# Altium PCB main.PcbDoc
Units mil, origin at the board's own origin, x right, y up, seen from the top; angles counter-clockwise.
Board outline 2130 x 1565 mil, 2 copper layers (Top Layer, Bottom Layer); 12 components, 7 nets, 26 pads, 4 vias.
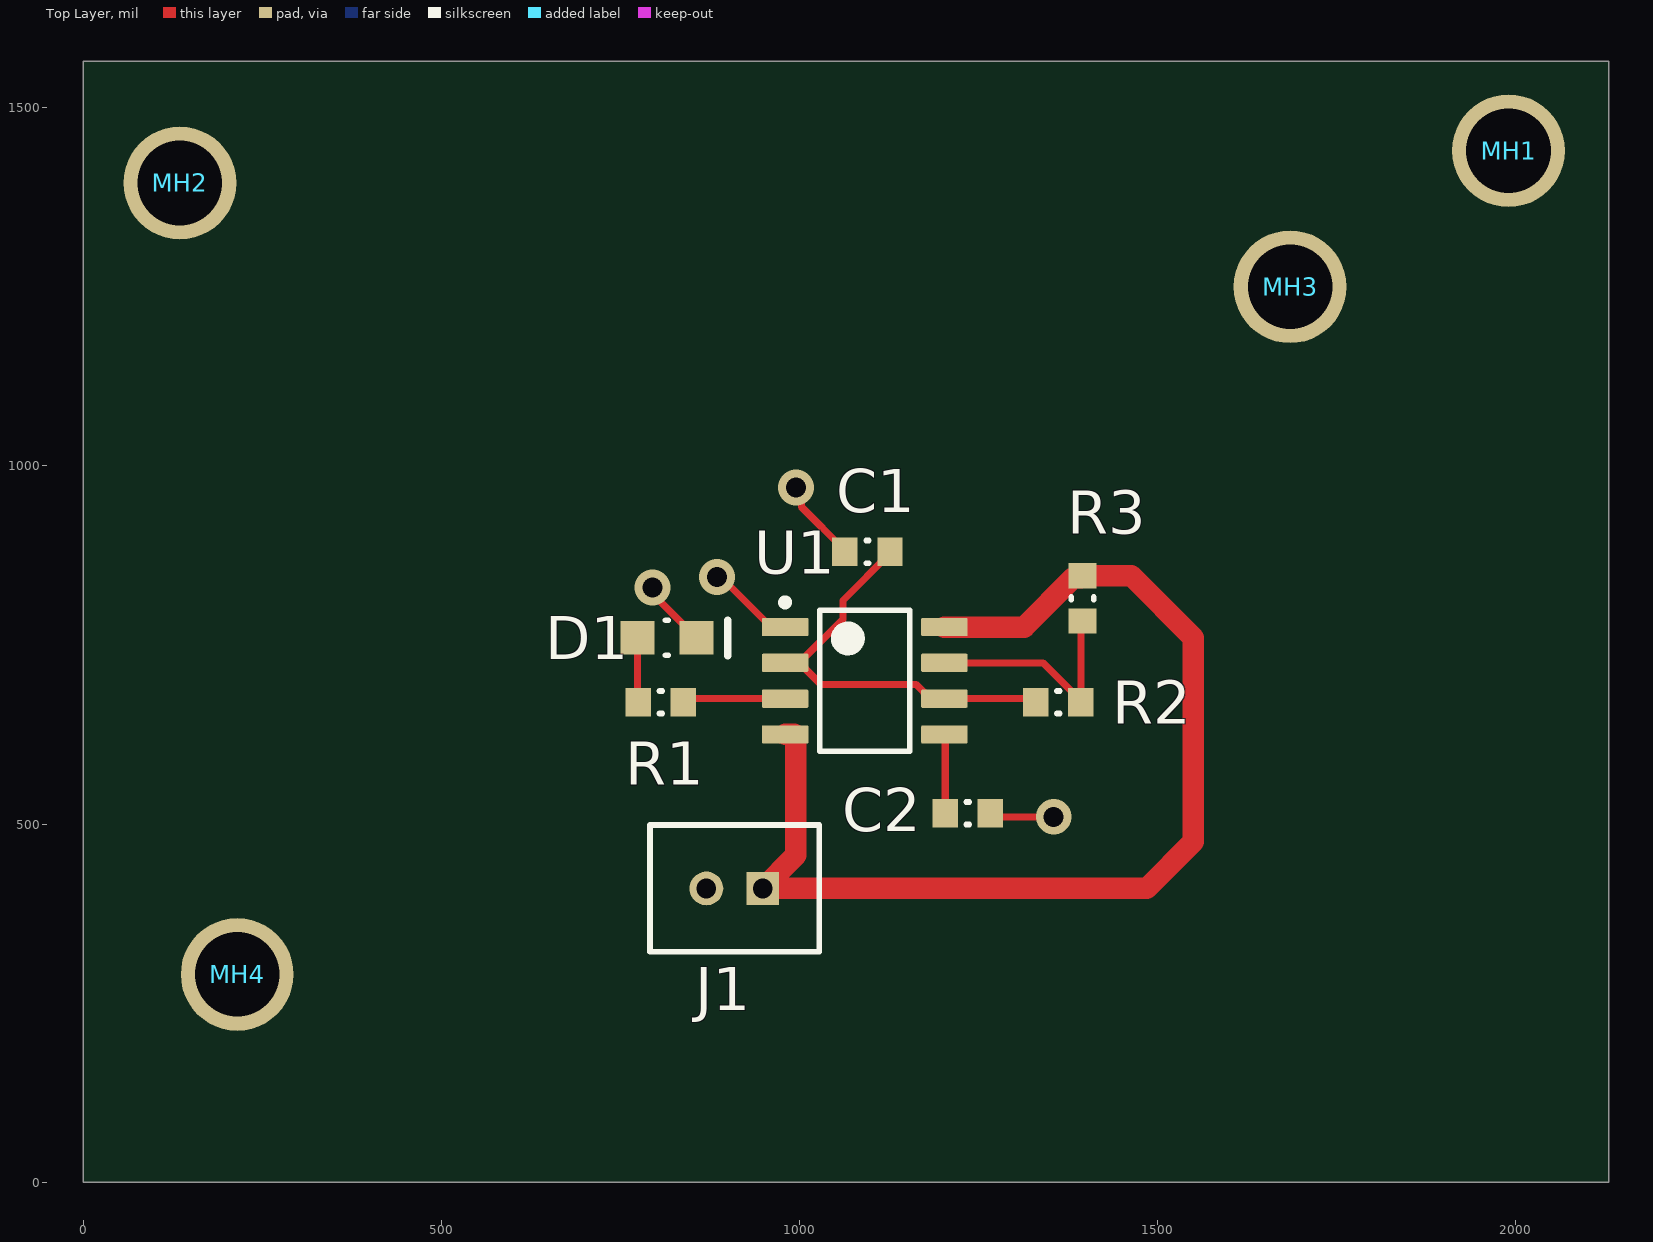
[diagram p0: Top Layer view]
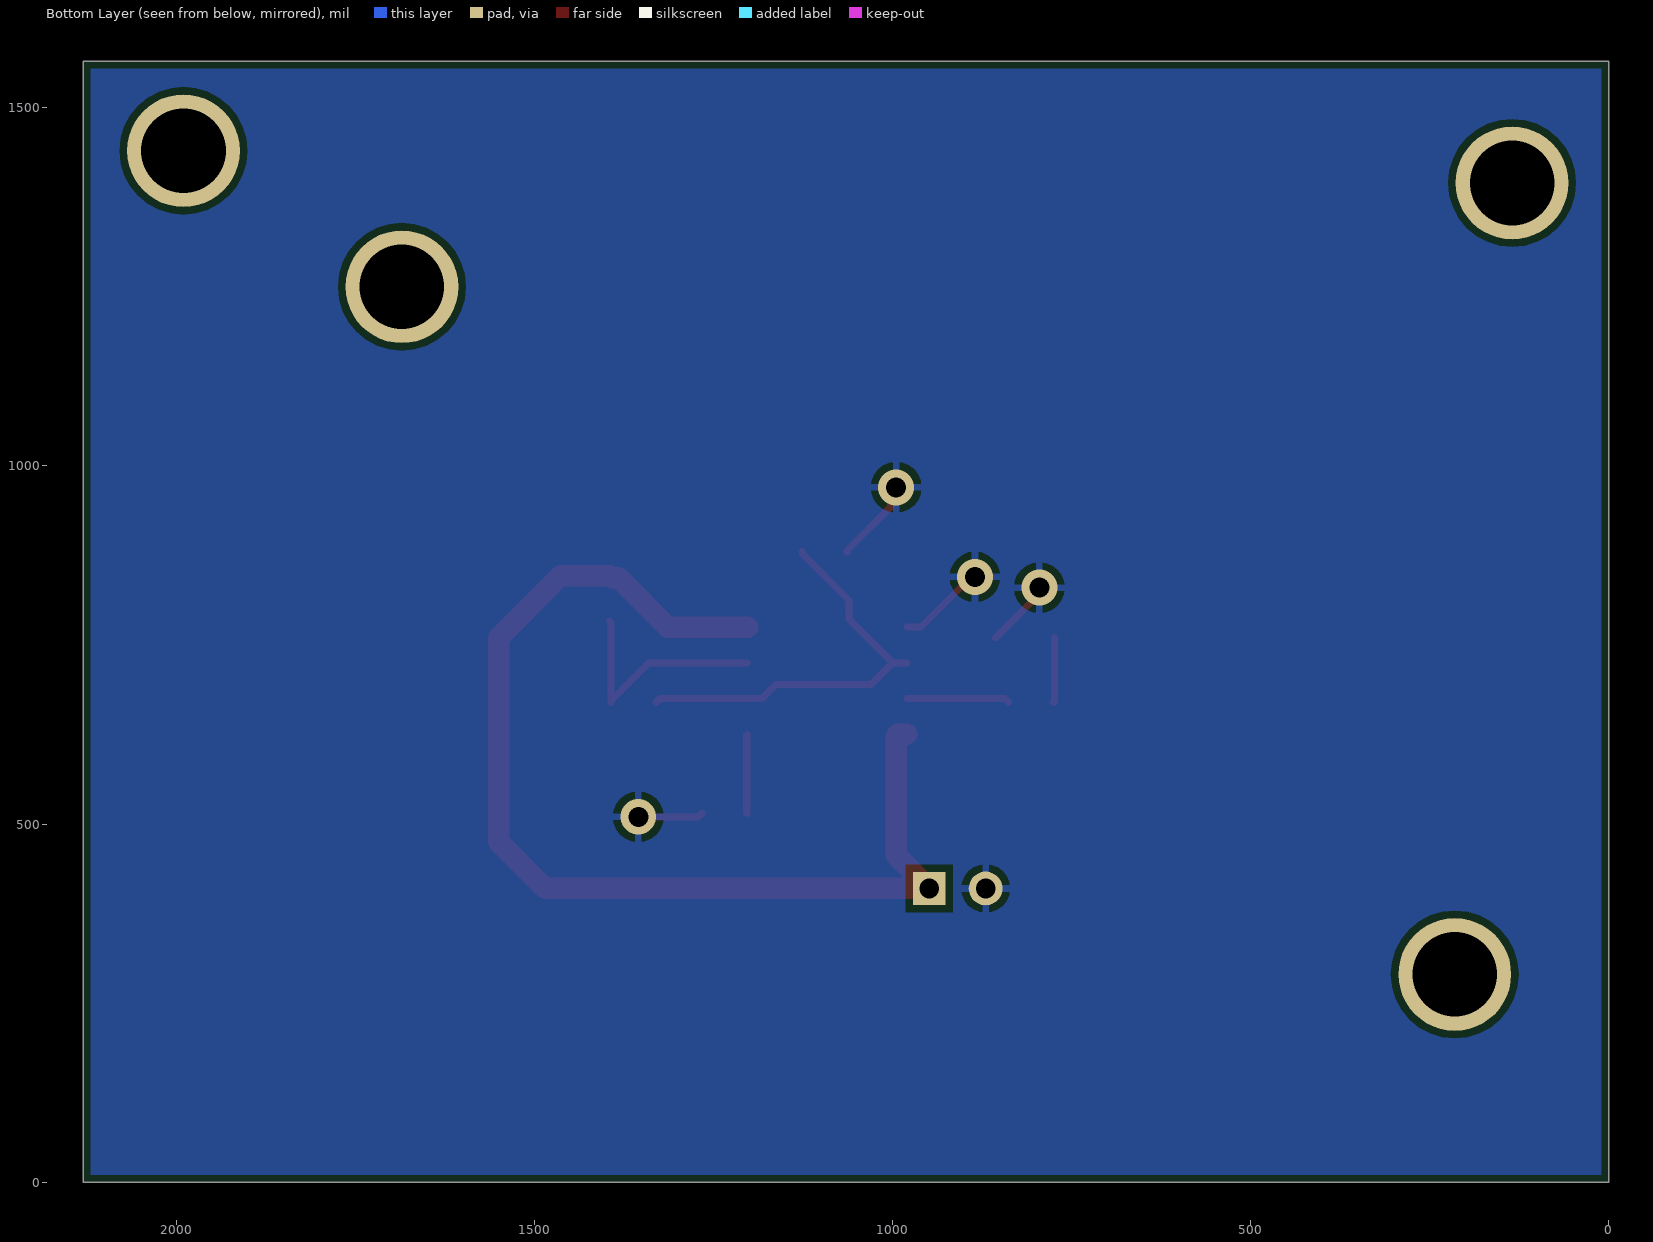
[diagram p1: Bottom Layer view, seen from below]

## Layer stack, top to bottom
Top Solder: solder mask 0.4, Solder Resist, Dk 3.5
Top Layer: signal copper 1.4
Dielectric 1: dielectric 12.6, FR-4, Dk 4.8
Bottom Layer: signal copper 1.4
Bottom Solder: solder mask 0.4, Solder Resist, Dk 3.5

## Board outline
0,0 2130,0 2130,1565 0,1565

## Design rules (kind name [scope] priority, off if disabled: settings)
BoardOutlineClearance [All] p1: gap=10 ignorepadtopadclearanceinfootprint=FALSE except(0: Arc-SplitContinuation Track-SplitContinuation SMDPad-SplitContinuation THPad-SplitContinuation Via-SplitContinuation Fill-SplitContinuation Poly-SplitContinuation Region-SplitContinuation Text-SplitContinuation)
Clearance [All] p1: gap=10 ignorepadtopadclearanceinfootprint=FALSE except(0: Arc-Hole Track-Hole SMDPad-Hole THPad-Hole Via-Hole Fill-Hole Poly-Hole Region-Hole Text-Hole)
PolygonConnect [All] p1: connectstyle=Relief reliefconductorwidth=10 reliefentries=4 polygonreliefangle="90 Angle" airgapwidth=10
RoutingVias [All] p1: holewidth=28 width=50 viastyle="Through Hole" minholewidth=28 minwidth=50 maxholewidth=28 maxwidth=50
SolderMaskExpansion [All] p1: expansion=4
Width 9V [InNet('+9V')] p1: maxlimit=30 minlimit=20 preferedwidth=20 minimp=50.000000 maximp=50.000000 favimp=50.000000
Width [All] p2: maxlimit=10 minlimit=10 preferedwidth=10
30 further rules are at their usual default settings.

## Components (designator, comment, footprint, x,y, rotation, side; value= is the part's Value field where it differs from the comment)
C1 "10uF" CAPC0603(1608)55_N 1095,880 r0 top
C2 "CAP_10nF_0603" CAPC0603(1608)55_N 1235,515 r180 top value=10nF
D1 "DIO_LED_G" LED_0805_LINE 815,760 r0 top
J1 "CON_2M" JST-B2B-PHSK 909.37,410 r180 top
MH1 "MOUNTING_HOLES" MOUNTING_HOLE 1990,1440 r0 top
MH2 "MOUNTING_HOLES" MOUNTING_HOLE 135,1395 r0 top
MH3 "MOUNTING_HOLES" MOUNTING_HOLE 1685,1250 r0 top
MH4 "MOUNTING_HOLES" MOUNTING_HOLE 215,290 r0 top
R1 "RES_1K_0603" RESC0603(1608)_N 806.5,670 r180 top value=1K
R2 "RES_10K_0603" RESC0603(1608)_N 1361.5,670 r0 top value=10K
R3 "RES_1K_0603" RESC0603(1608)_N 1395,815 r90 top value=1K
U1 "NE555D" 8-SOIC_M 1091.22,700 r0 top

## Footprints (in the part's own frame and the unit in brackets; to place one, negate y for a bottom-side part, rotate by r counter-clockwise, add the part's x,y. Pads: shape width x height; smd on the part's side, far side on the other; paste and mask are expansions set on the pad)
8-SOIC_M [mm] "SOIC, 8-Leads, Body 5x4mm, Pitch 1.27mm, IPC Low Density"
  rrect15% 1.65x0.65 smd: 1(-2.825,1.905) 2(-2.825,0.635) 3(-2.825,-0.635) 4(-2.825,-1.905) 5(2.825,-1.905) 6(2.825,-0.635) 7(2.825,0.635) 8(2.825,1.905)
  silkscreen extent -2.95,-2.5 1.6,2.9, body extent -3,-2.45 3,2.45, height 1.63
CAPC0603(1608)55_N [mm] "Chip Capacitor, Body 1.6x0.8mm, Height 0.55mm, IPC Medium Density"
  rect 0.9x1 smd: 1(-0.8,0) 2(0.8,0)
  silkscreen extent -0.05,-0.4 0.05,0.4, body extent -0.87,-0.48 0.88,0.47, height 0.55
JST-B2B-PHSK [mm]
  rect 1.162x1.162 / inner rect 1.524x1.524 / far side rect 1.162x1.162 hole 0.7: 1(-1,0)
  round 1.2 / inner round 1.524 / far side round 1.2 hole 0.7: 2(1,0)
  silkscreen extent -3,-2.25 3,2.25
LED_0805_LINE [mm] "SMD, 2-Leads, Body 2x1.25mm"
  rect 1.2x1.2 smd: 1(-1.05,0) 2(1.05,0)
  silkscreen extent -0.05,-0.64 2.16,0.64, body extent -1,-0.63 1,0.63, height 0.8
MOUNTING_HOLE [mm]
  round 4 hole 3 unplated: 0(0,0)
RESC0603(1608)_N [mm] "Chip Resistor, Body 1.6x0.8mm, IPC Medium Density"
  rect 0.9x1 smd: 1(-0.8,0) 2(0.8,0)
  silkscreen extent -0.05,-0.4 0.05,0.4, body extent -0.85,-0.47 0.85,0.47, height 0.6

## Part data
C1: library part CAP_10uF_0603, "CAP CER 10UF 10V X5R 0603", Digikey Part Number=311-1817-1-ND, Manufacturer=Yageo, MPN=CC0603MRX5R6BB106, Package="0603 (1608 Metric)", Voltage Rating=10V, Dimensions="0.063\" L x 0.031\" W (1.60mm x 0.80mm)"
C2: "CAP CER 10000PF 16V X7R 0603", Digikey Part Number=311-3369-1-ND, Manufacturer=Yageo, MPN=CC0603KRX7R7BB103, Package="0603 (1608 Metric)", Temperature Coefficient=X7R, Voltage Rating=16V, Dimensions="0.063\" L x 0.031\" W (1.60mm x 0.80mm)"
D1: "LED GREEN DIFFUSED 0805 SMD", Digikey Part Number=475-1410-1-ND, Forward Voltage Drop=2.2V, Manufacturer=OSRAM, MPN="LG R971-KN-1", Package="0805 (2012 Metric)"
MH1 MH2 MH3 MH4: "6cm x 6cm"
R1 R3: "RES SMD 1K OHM 5% 1/10W 0603", Digikey Part Number=311-1.0KGRCT-ND, Manufacturer=Yageo, MPN=RC0603JR-071KL, Package="0603 (1608 Metric)", Tolerance=5%, Dimensions="0.063\" L x 0.031\" W (1.60mm x 0.80mm)"
R2: "RES SMD 10K OHM 5% 1/10W 0603", Digikey Part Number=311-10KGRCT-ND, Manufacturer=Yageo, MPN=RC0603JR-0710KL, Package="0603 (1608 Metric)", Tolerance=5%, Dimensions="0.063\" L x 0.031\" W (1.60mm x 0.80mm)"
U1: "Precision Timer, 4.5 to 16 V, 0 to 70 degC, 8-Pin SOIC (D), Green (RoHS & no Sb/Br), Tube", Digital IC Case Style=SOIC, Frequency=500kHz, IC Temperature Range=Commercial, Manufacturer="Texas Instruments", Operating Frequency Max=0.5MHz, Operating Mode=Astable,Monostable, Operating Temperature Max=70°C, Operating Temperature Min=0°C, Operating Temperature Range=0°Cto+70°C, Package Description="8-Pin Small Outline Integrated Circuit, Body 4.9 x 3.9 mm, Pitch 1.27 mm", Package Reference=D8, PartNumber=NE555, Supply Voltage Max=16V, Supply Voltage Min=4.5V, Supply Voltage Range=4.5Vto16V, Base Number=555, Clock External Input=No, Datasheet URL=http://www.ti.com/general/docs/lit/getliterature.tsp?genericPartNumber=NE555&fileType=pdf, Datasheet Version="Rev. I, 09/2014", Device Marking=NE555D, IC Generic Number=555, Logic Function Number=555, Manufacturer URL=http://www.ti.com/, Mounting Technology=SurfaceMount, No. of Channels=1, No. of Pins=8, No. of Timers=1, Package / Case=SOIC, Package URL=http://www.ti.com/lit/ml/msoi002j/msoi002j.pdf, SVHC=NoSVHC(19-Dec-2012)

## Via types
v1: diameter 50, hole 28, Top Layer to Bottom Layer, 4 vias

## Nets (pads, with @x,y where several pads share a name; then routed paths per layer and width w, separated by ;. In a path a pad name is that pad's centre, name@x,y a point inside that pad or via, vN(x,y) a via of type N, cw(c..) or ccw(c..) an arc to the next point about the centre after c; other vN are vias at no path point)
+9V: J1.1 R3.2 U1.4 U1.8 | length 1574.1
  Top Layer w30: U1.4 992.8,625 995,622.8 995,456.26 J1.1 1485,410 1550,475 1550,760 1463.5,846.5 R3.2 1392.28,843.78 1382.52,843.78 1313.74,775 U1.8
CONT: C2.2 U1.5 | length 110.4
  Top Layer w10: U1.5 1203.5,623.94 C2.2
DISCH: R2.2 R3.1 U1.7 | length 326.9
  Top Layer w10: U1.7 1339.96,725 R2.2@1392.99,671.97 ; R2.2 R2.2@1392.99,671.97 ; R3.1 1392.99,781.5 R2.2@1392.99,671.97
GND: C1.1 C2.1 D1.2 J1.2 U1.1 | length 428.4
  Top Layer w10: v1(795,830) 795,821.34 D1.2 ; v1(885,845) 890.32,845 960.32,775 U1.1 ; v1(995,970) 1002.65,962.35 1002.65,942.82 1063.5,881.97 C1.1 ; C2.1 1271.5,510 v1(1355,510)
OUT_RES: R1.1 U1.3 | length 144.1
  Top Layer w10: R1.1 842.99,675 U1.3
RES_LED: D1.1 R1.2 | length 90.6
  Top Layer w10: D1.1 773.66,671.34 R1.2
TRIG: C1.2 R2.1 U1.2 U1.6 | length 580.3
  Top Layer w10: U1.2 U1.2@999.68,725 ; C1.2 1126.5,878.03 1060.63,812.17 1060.63,785.94 U1.2@999.68,725 ; R2.1 1325,675 U1.6 1182.76,675 1162.76,695 1029.68,695 U1.2@999.68,725
pads on no net: MH1.0 MH2.0 MH3.0 MH4.0

## Polygon pours and split planes (outlines as drawn)
GND on Bottom Layer (solid, pour order 0): -145,1670 -145,-380 2580,-380 2580,1755